# Altium PCB Ultrasonic_Localisation_backup.PcbDoc
Units mm, origin at the board's own origin, x right, y up, seen from the top; angles counter-clockwise.
Board outline 29 x 59 mm, 4 copper layers (Top Layer, MidLayer1, GroundPlane, Bottom Layer); 42 components, 37 nets, 234 pads, 0 vias.
Unrouted connection lines stored in the file: 104.
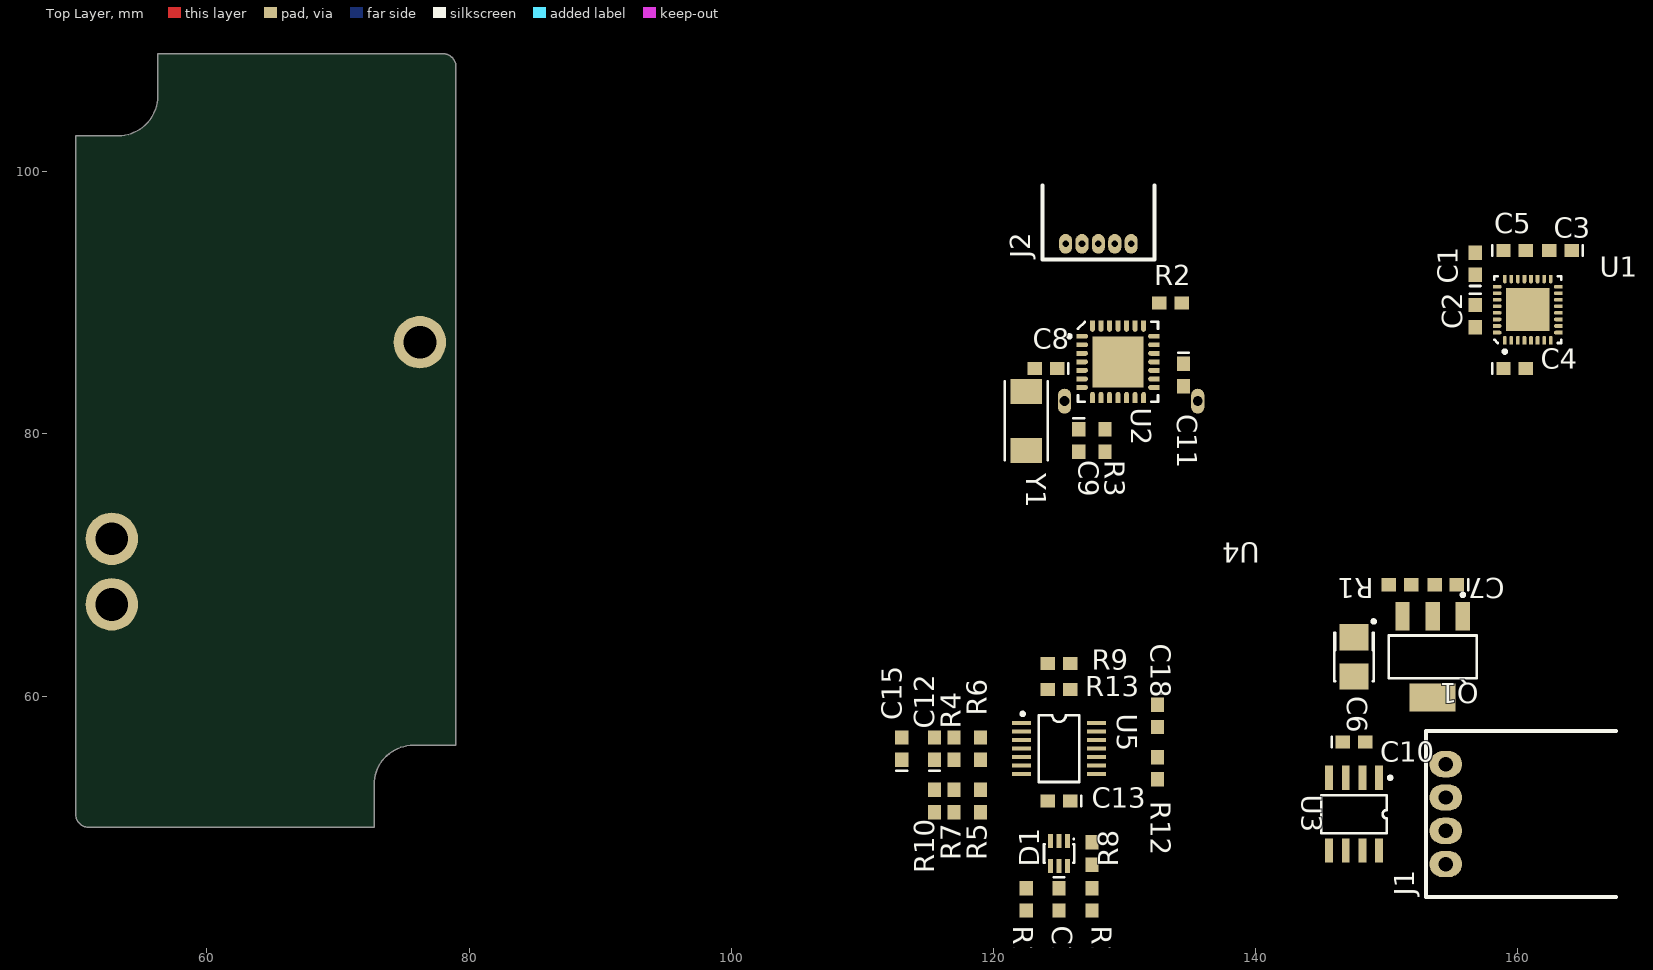
[diagram p0: Top Layer view]
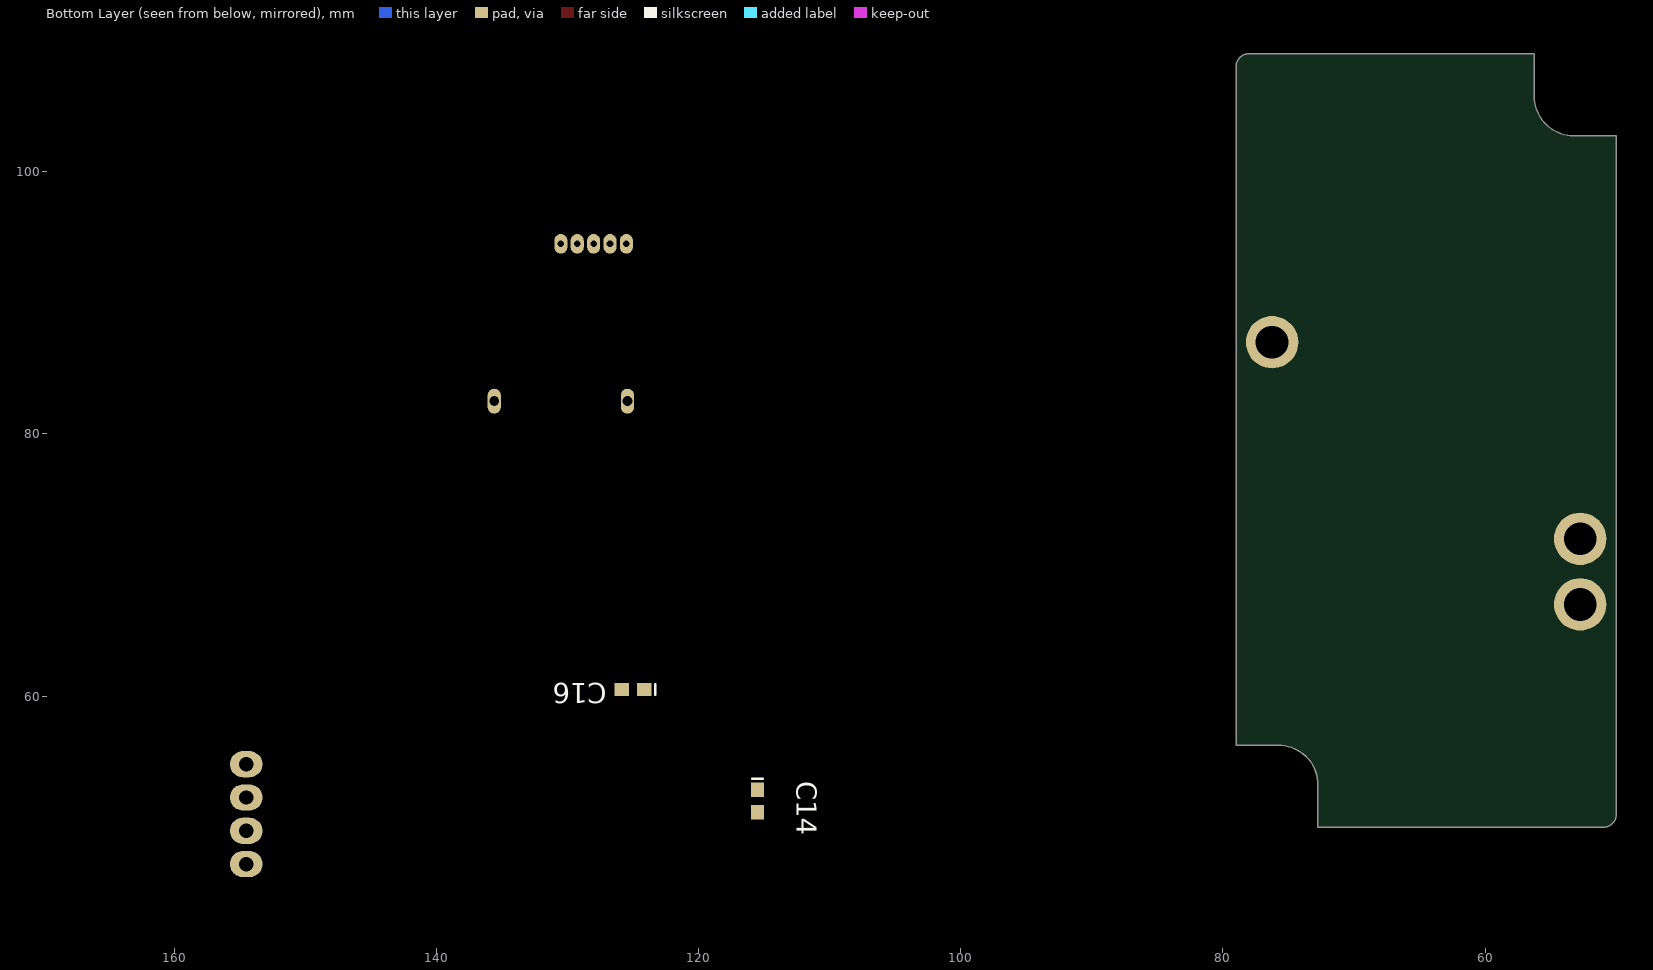
[diagram p1: Bottom Layer view, seen from below]
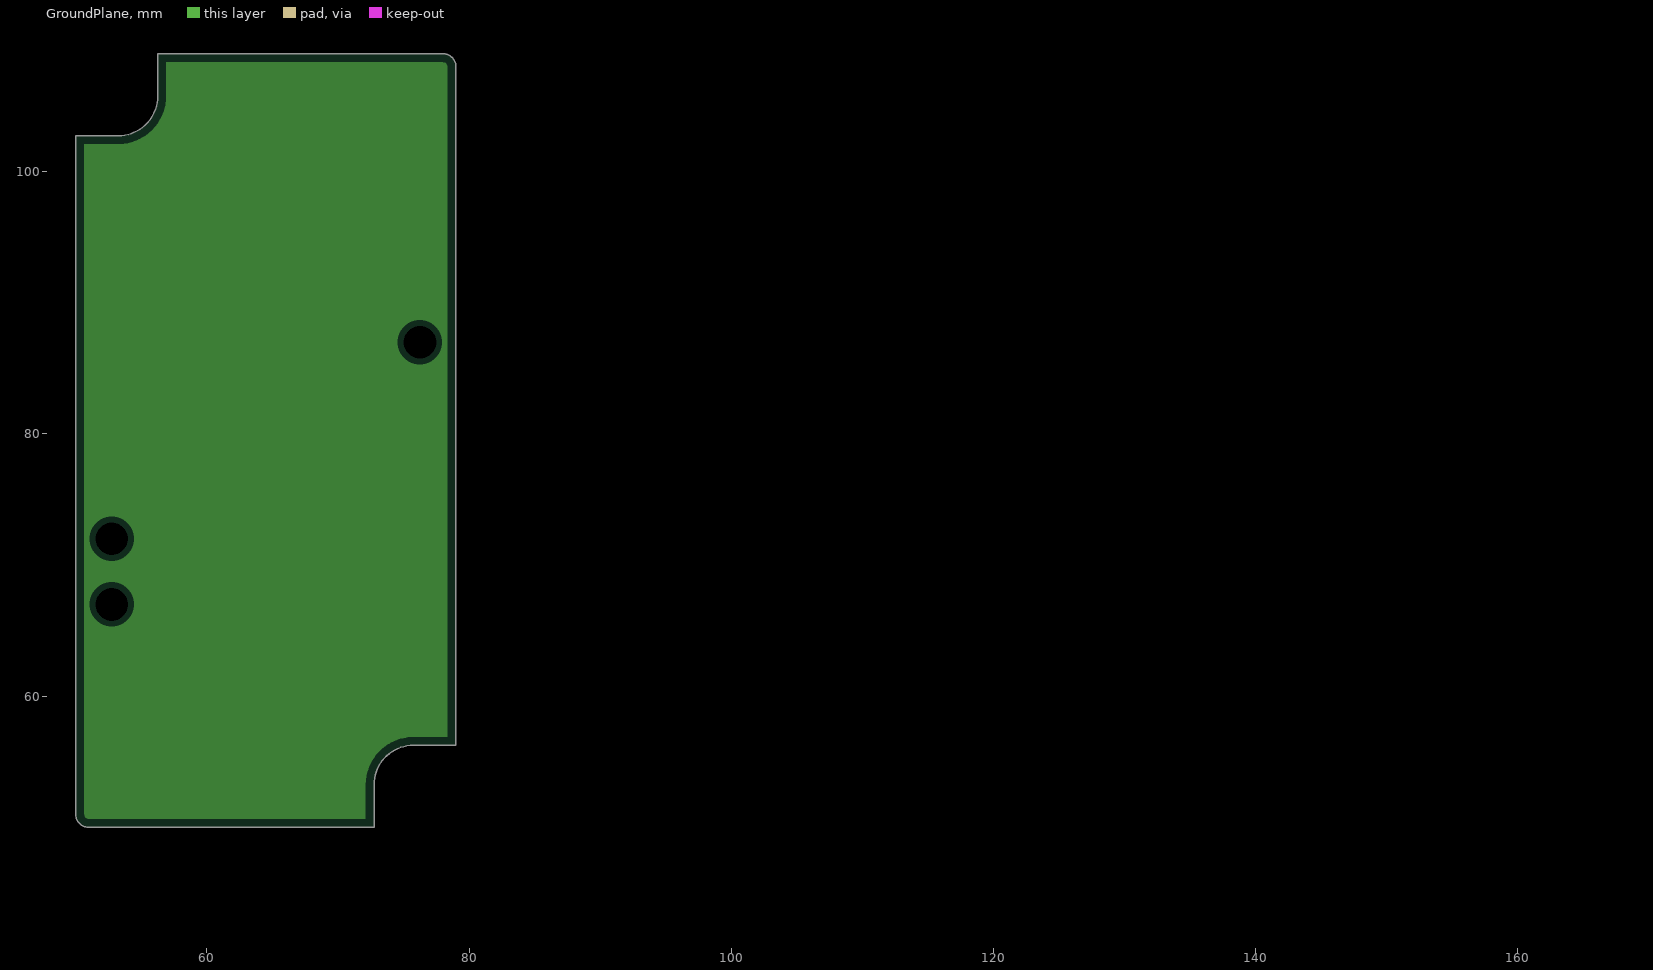
[diagram p2: GroundPlane, clearances drawn from the general rule]

## Layer stack, top to bottom
Top Layer: signal copper 0.036
Dielectric: prepreg 0.32, FR-4, Dk 4.8
MidLayer1: signal copper 0.036
Dielectric: core 0.32, FR-4, Dk 4.8
GroundPlane: plane copper 0.036
Dielectric: prepreg 0.32, FR-4, Dk 4.8
Bottom Layer: signal copper 0.036

## Board outline
50,51 50,102.75 53.25,102.75 ccw(c53.25,105.75) 56.25,105.75 56.25,109 78,109 cw(c78,108) 79,108 79,56.25 75.75,56.25 ccw(c75.75,53.25) 72.75,53.25 72.75,50 51,50 cw(c51,51)

## Design rules (kind name [scope] priority, off if disabled: settings)
Clearance [All] p1: gap=0.152
ComponentClearance [All] p1 off: gap=0.254 collisioncheckmode=3 verticalgap=0.254
HoleSize [All] p1: absolutevalues=TRUE maxlimit=4 minlimit=0.2 maxpercent=80.000 minpercent=20.000
PlaneClearance [All] p1: clearance=0.445
PlaneConnect [All] p1: planeconnectstyle=Direct reliefexpansion=0.508 reliefentries=4 reliefconductorwidth=0.254 reliefairgap=0.254
PolygonConnect [All] p1: connectstyle=Direct reliefconductorwidth=0.254 reliefentries=4 polygonreliefangle="90 Angle"
RoutingVias [All] p1: holewidth=0.2 width=0.65 viastyle="Through Hole" minholewidth=0.2 minwidth=0.65 maxholewidth=1.5 maxwidth=2.1
ShortCircuit ShortCircuit_Unconnected_Pins [IsPad and not InnetClass('All') vs IsPad and not InnetClass('All')] p1: allowed=TRUE
ShortCircuit [All] p2: allowed=FALSE
SolderMaskExpansion [All] p1: expansion=0.075
TestPointUsage [All] p1: valid=0 allowmultiple=FALSE
Testpoint [All] p1: side=15 testpointundercomponent=TRUE minsize=1.016 maxsize=2.54 preferedsize=1.524 minholesize=0 maxholesize=1.016 preferedholesize=0.813 testpointgrid=0.025 style=1023 order=0123456789
Width [All] p1: maxlimit=3 minlimit=0.152 preferedwidth=0.3 minimp=50.000000 maximp=50.000000 favimp=50.000000
14 further rules are at their usual default settings.

## Classes and differential pairs
component class Ultrasonic_Localisation: C6 C7 C8 C9 C10 C11 J1 J2 Q1 R1 R2 R3 U2 U3 U4 Y1
component class S2: C1 C2 C3 C4 C5 U1
component class S1: C12 C13 C14 C15 C16 C17 C18 D1 R4 R5 R6 R7 R8 R9 R10 R11 R12 R13 R14 U5

## Components (designator, comment, footprint, x,y, rotation, side; value= is the part's Value field where it differs from the comment)
C1 "UMK107BJ104KA-T" CC1608-0603 156.75,92.985 r90 top
C2 "UMK107BJ104KA-T" CC1608-0603 156.75,88.985 r270 top
C3 "UMK107BJ104KA-T" CC1608-0603 163.25,93.985 r180 top
C4 "UMK107BJ104KA-T" CC1608-0603 159.75,84.985 r0 top
C5 "UMK107BJ104KA-T" CC1608-0603 159.75,93.985 r0 top
C6 "TPSB106K016R0800" TC3528-1411 147.5,63 r270 top
C7 "UMK107BJ104KA-T" CC1608-0603 154.5,68.5 r180 top
C8 "Cap" CC1608-0603 124,85 r180 top
C9 "Cap" CC1608-0603 126.5,79.5 r270 top
C10 "UMK107BJ104KA-T" CC1608-0603 147.5,56.5 r0 top
C11 "UMK107BJ104KA-T" CC1608-0603 134.5,84.5 r270 top
C12 "Cap" CC1608-0603 115.5,56 r90 top
C13 "Cap" CC1608-0603 125,52 r180 top
C14 "Cap" CC1608-0603 115.5,52 r270 bottom
C15 "Cap" CC1608-0603 113,56 r90 top
C16 "Cap" CC1608-0603 125,60.5 r0 bottom
C17 "Cap" CC1608-0603 125,44.5 r270 top
C18 "Cap" CC1608-0603 132.5,58.5 r270 top
D1 "BAV99DW-7-F" SOT-323-6L 125,48 r180 top
J1 "70553-0003" CON_CAN_Device-4 154.5,51 r90 top
J2 "53048-0510" CON_ISP_H 128,94.5 r180 top
Q1 "MIC5201-5.0YS" DSO-G3 153.5,63 r180 top
R1 "Res" CR1608-0603 151,68.5 r0 top
R2 "Res" CR1608-0603 133.5,90 r0 top
R3 "Res" CR1608-0603 128.5,79.5 r270 top
R4 "Res" CR1608-0603 117,56 r270 top
R5 "Res" CR1608-0603 119,52 r90 top
R6 "Res" CR1608-0603 119,56 r270 top
R7 "Res" CR1608-0603 117,52 r270 top
R8 "Res" CR1608-0603 127.5,48 r270 top
R9 "Res" CR1608-0603 125,62.5 r180 top
R10 "Res" CR1608-0603 115.5,52 r270 top
R11 "Res" CR1608-0603 122.5,44.5 r270 top
R12 "Res" CR1608-0603 132.5,54.5 r270 top
R13 "Res" CR1608-0603 125,60.5 r0 top
R14 "Res" CR1608-0603 127.5,44.5 r270 top
U1 "p" QFN5X5-32 160.75,89.485 r0 top
U2 "PIC18F2580-I/ML" QFN6X6-28 129.5,85.5 r270 top
U3 "TJA1040TD-T" SO-G8/E2.9 147.5,51 r180 top
U4 "MAXBOTIX_SENSOR" "Maxbotix Sensor" 130.5,82.5 r180 top
U5 "LMV324IPWR" TSSO5x6-G14/X.3 125,56 r270 top
Y1 "CS10-16.000MABJ-UT" CS10 122.5,81 r270 top

## Footprints (in the part's own frame and the unit in brackets; to place one, negate y for a bottom-side part, rotate by r counter-clockwise, add the part's x,y. Pads: shape width x height; smd on the part's side, far side on the other; paste and mask are expansions set on the pad)
CC1608-0603 [mm] "Chip Capacitor; Body 1.6 x 0.8 mm (LxW typ)"
  rect 1.1x1 smd: 1(-0.85,0) 2(0.85,0)
  silkscreen extent -1.7,-0.4 -1.7,0.4
CON_CAN_Device-4 [mm] "4-pin CAN connector - device side"
  oval 2x2.5 hole 1.1: 1(-3.81,0) 2(-1.27,0) 3(1.27,0) 4(3.81,0)
  silkscreen extent -6.33,-13 6.33,1.5
CON_ISP_H [mm] "Microchip ISP Connector horizontal"
  oval 1x1.5 hole 0.5: 1(-2.5,0) 2(-1.25,0) 3(0,0) 4(1.25,0) 5(2.5,0)
  silkscreen extent -4.28,-4.45 4.28,1.2
CR1608-0603 [mm] "Chip Resistor; Body 1.6 x 0.8 mm (LxW typ)"
  rect 1.1x1 smd: 1(-0.85,0) 2(0.85,0)
CS10 [mm] "Crystal"
  rect 1.9x2.4 smd: 1(-2.25,0) 2(2.25,0)
  silkscreen extent -3,-1.65 3,1.65
DSO-G3 [mm] "SOT-223/SC-73; 4 Leads; Body 6.7 x 7.3 mm, inc. leads (LxW max)"
  rect 1.1x2.15 smd: 1(-2.3,-3.1) 2(0,-3.1) 3(2.3,-3.1)
  rect 3.5x2.15 smd: 4(0,3.1)
  silkscreen extent -3.35,-4.85 3.35,1.63
"Maxbotix Sensor" [mil] "Maxbotix Ultrasonic Sensor"
  oval 40x75 hole 30: 1(-200,0) 2(200,0)
QFN5X5-32 [mm] "Quad Flat No Lead; 32 Terminals; Body 5 x 5 mm; Pitch 0.5 mm"
  rect 0.28x0.28 smd: 1(-1.75,-2.515) 2(-1.25,-2.515) 3(-0.75,-2.515) 4(-0.25,-2.515) 5(0.25,-2.515) 6(0.75,-2.515) 7(1.25,-2.515) 8(1.75,-2.515) 9(2.515,-1.75) 10(2.515,-1.25) 11(2.515,-0.75) 12(2.515,-0.25) 13(2.515,0.25) 14(2.515,0.75) 15(2.515,1.25) 16(2.515,1.75) 17(1.75,2.515) 18(1.25,2.515) 19(0.75,2.515) 20(0.25,2.515) 21(-0.25,2.515) 22(-0.75,2.515) 23(-1.25,2.515) 24(-1.75,2.515) 25(-2.515,1.75) 26(-2.515,1.25) 27(-2.515,0.75) 28(-2.515,0.25) 29(-2.515,-0.25) 30(-2.515,-0.75) 31(-2.515,-1.25) 32(-2.515,-1.75)
  oval 0.28x0.66 smd: 1(-1.75,-2.325) 2(-1.25,-2.325) 3(-0.75,-2.325) 4(-0.25,-2.325) 5(0.25,-2.325) 6(0.75,-2.325) 7(1.25,-2.325) 8(1.75,-2.325) 17(1.75,2.325) 18(1.25,2.325) 19(0.75,2.325) 20(0.25,2.325) 21(-0.25,2.325) 22(-0.75,2.325) 23(-1.25,2.325) 24(-1.75,2.325)
  oval 0.66x0.28 smd: 9(2.325,-1.75) 10(2.325,-1.25) 11(2.325,-0.75) 12(2.325,-0.25) 13(2.325,0.25) 14(2.325,0.75) 15(2.325,1.25) 16(2.325,1.75) 25(-2.325,1.75) 26(-2.325,1.25) 27(-2.325,0.75) 28(-2.325,0.25) 29(-2.325,-0.25) 30(-2.325,-0.75) 31(-2.325,-1.25) 32(-2.325,-1.75)
  rect 3.3x3.3 smd: 33(0,0)
  silkscreen extent -2.55,-3.33 2.55,2.55
QFN6X6-28 [mm] "Quad Flat No Lead, Plastic, Punch; 28 Terminals; Body 6 x 6 mm; Pitch 0.65 mm"
  oval 0.37x0.86 smd: 1(-1.95,-2.725) 2(-1.3,-2.725) 3(-0.65,-2.725) 4(0,-2.725) 5(0.65,-2.725) 6(1.3,-2.725) 7(1.95,-2.725) 15(1.95,2.725) 16(1.3,2.725) 17(0.65,2.725) 18(0,2.725) 19(-0.65,2.725) 20(-1.3,2.725) 21(-1.95,2.725)
  rect 0.37x0.37 smd: 1(-1.95,-2.97) 2(-1.3,-2.97) 3(-0.65,-2.97) 4(0,-2.97) 5(0.65,-2.97) 6(1.3,-2.97) 7(1.95,-2.97) 8(2.97,-1.95) 9(2.97,-1.3) 10(2.97,-0.65) 11(2.97,0) 12(2.97,0.65) 13(2.97,1.3) 14(2.97,1.95) 15(1.95,2.97) 16(1.3,2.97) 17(0.65,2.97) 18(0,2.97) 19(-0.65,2.97) 20(-1.3,2.97) 21(-1.95,2.97) 22(-2.97,1.95) 23(-2.97,1.3) 24(-2.97,0.65) 25(-2.97,0) 26(-2.97,-0.65) 27(-2.97,-1.3) 28(-2.97,-1.95)
  oval 0.86x0.37 smd: 8(2.725,-1.95) 9(2.725,-1.3) 10(2.725,-0.65) 11(2.725,0) 12(2.725,0.65) 13(2.725,1.3) 14(2.725,1.95) 22(-2.725,1.95) 23(-2.725,1.3) 24(-2.725,0.65) 25(-2.725,0) 26(-2.725,-0.65) 27(-2.725,-1.3) 28(-2.725,-1.95)
  rect 3.9x3.9 smd: 29(0,0)
  silkscreen extent -3.05,-3.83 3.05,3.05
SO-G8/E2.9 [mm] "Small Outline; 8 Leads; Body Width 3.9 mm; Pitch 1.27 mm"
  rect 0.6x1.85 smd: 1(-1.905,-2.775) 2(-0.635,-2.775) 3(0.635,-2.775) 4(1.905,-2.775) 5(1.905,2.775) 6(0.635,2.775) 7(-0.635,2.775) 8(-1.905,2.775)
  silkscreen extent -2.88,-2.9 2.5,1.45
SOT-323-6L [mm] "SOT-323-6L"
  rect 0.4x1.05 smd: 1(-0.65,-0.95) 2(0,-0.95) 3(0.65,-0.95) 4(0.65,0.95) 5(0,0.95) 6(-0.65,0.95)
  silkscreen extent -1.17,-1.15 1.15,0.7
TC3528-1411 [mm] "Capacitor, SM Tantalum; Body 3.5 x 2.8 mm (LxW typ)"
  rect 2x2.2 smd: 1(-1.5,0) 2(1.5,0)
  silkscreen extent -2.82,-1.5 1.85,1.63
TSSO5x6-G14/X.3 [mm] "Shrink Small Outline; 14 Leads; Body Width 4.4 mm; Pitch 0.65 mm"
  rect 0.3x1.45 smd: 1(-1.95,-2.875) 2(-1.3,-2.875) 3(-0.65,-2.875) 4(0,-2.875) 5(0.65,-2.875) 6(1.3,-2.875) 7(1.95,-2.875) 8(1.95,2.875) 9(1.3,2.875) 10(0.65,2.875) 11(0,2.875) 12(-0.65,2.875) 13(-1.3,2.875) 14(-1.95,2.875)
  silkscreen extent -2.77,-2.9 2.55,1.55

## Part data
C1 C2 C3 C4 C5 C7 C10 C11: library part Cap, "Capacitor"
C6: library part "Cap Pol", "Polarized Capacitor (Surface Mount)"
C8 C9 C12 C13 C14 C15 C16 C17 C18: "Capacitor"
D1: library part BAV99DW, "Quad surface mount switching diode array"
J1: library part CON_CAN_DEVICE, "4 pin CAN Connector 2.54mm pitch"
J2: library part CON_ISP_Header_5p_1.25mm_horizontal, "6 pin header - 1.25mm pitch horizontal"
Q1: "5V LDO 200mA"
R1 R2 R3 R4 R5 R6 R7 R8 R9 R10 R11 R12 R13 R14: "Resistor"
U1: library part MAX3243E_SMALL, "RS232 Transceiver"
U2: "8 bit CAN MCU"
U3: "5V CAN Transceiver"
U4: "Maxbotix Ultrasonic Sensor"
U5: "Rail-to-Rail Operational Amplifier"
Y1: library part CS10, "Crystal Oscillator"

## Free pads (board coordinates)
  round 4 hole 2.5: 0(52.75,67) 0(52.75,72) 0(76.25,87)

## Nets (pads, with @x,y where several pads share a name; then routed paths per layer and width w, separated by ;. In a path a pad name is that pad's centre, name@x,y a point inside that pad or via, vN(x,y) a via of type N, cw(c..) or ccw(c..) an arc to the next point about the centre after c; other vN are vias at no path point)
C\A\N\_\E\N\: U2.3 U3.8
CAN_RX: U2.21 U3.4
CAN_TX: U2.20 U3.1
CANH/UART_TX: J1.2 U1.6 U3.7
CANL/UART_RX: J1.3 U1.1 U3.6
GND: C3.2 C4.2 C5.2 C6.2 C7.2 C8.1 C9.1 C10.2 C11.2 C13.1 C14.1 C15.1 C17.1 C18.1 J1.4 J2.5 pad.0 Q1.2 Q1.4 R10.1 U1.24 U1.33 U2.5 U2.16 U2.29 U3.2 U5.11
M\C\L\R\: J2.2 R2.1 U2.26
NetC1_1: C1.1 U1.28
NetC1_2: C1.2 U1.23
NetC2_1: C2.1 U1.29
NetC2_2: C2.2 U1.30
NetC4_1: C4.1 U1.31
NetC5_1: C5.1 U1.27
NetC7_1: C7.1 J1.1 Q1.1 R1.2
NetC8_2: C8.2 U2.6 Y1.1
NetC9_2: C9.2 R3.2 Y1.2
NetC12_1: C12.1 R4.2 R7.1
NetC12_2: C12.2 U2.13 U4.1
NetC14_2: C14.2 R5.1 R7.2 R10.2 U5.10
NetC15_2: C15.2 R6.1 R9.2
NetC16_2: C16.2 R9.1 R13.2 U5.9
NetC17_2: C17.2 R14.2
NetC18_2: C18.2 R12.1
NetD1_1: D1.1 D1.2 D1.5 R8.1 U5.1 U5.5
NetD1_3: D1.3 D1.4 R11.1 R12.2 U5.6
NetD1_6: D1.6 R8.2 R14.1 U5.2
NetR3_1: R3.1 U2.7
NetR4_1: R4.1 U5.3
NetR11_2: R11.2 U5.7
NetU2_12: U2.12 U4.2
PGC: J2.4 U2.24
PGD: J2.3 U2.25
SNSR_OP: C16.1 R13.1 U2.27 U5.8
U\A\R\T\_\E\N\: U1.21 U2.4
USART/RX: U1.18 U2.15
USART/TX: U1.12 U2.14
VCC5V: C3.1 C6.1 C10.1 C11.1 C13.2 J2.1 Q1.3 R1.1 R2.2 R5.2 R6.2 U1.22 U1.26 U2.17 U3.3 U5.4
pads on no net: U1.2 U1.3 U1.4 U1.5 U1.7 U1.8 U1.9 U1.10 U1.11 U1.13 U1.14 U1.15 U1.16 U1.17 U1.19 U1.20 U1.25 U1.32 U2.1 U2.2 U2.8 U2.9 U2.10 U2.11 U2.18 U2.19 U2.22 U2.23 U2.28 U3.5 U5.12 U5.13 U5.14

## Polygon pours and split planes (outlines as drawn)
no net on GroundPlane (split plane): 78.137,108.332 78.254,108.254 78.332,108.137 78.356,108.017 78.353,108 78.353,56.897 75.75,56.897 75.74,56.895 75.18,56.851 74.623,56.718 74.095,56.499 73.607,56.2 73.172,55.828 72.8,55.393 72.501,54.905 72.282,54.377 72.149,53.82 72.105,53.26 72.103,53.25 72.103,50.647 51,50.647 50.983,50.644 50.863,50.668 50.746,50.746 50.668,50.863 50.644,50.983 50.647,51 50.647,102.103 53.25,102.103 53.26,102.105 53.82,102.149 54.377,102.282 54.905,102.501 55.393,102.8 55.828,103.172 56.2,103.607 56.499,104.095 56.718,104.623 56.851,105.18 56.895,105.74 56.897,105.75 56.897,108.353 78,108.353 78.017,108.356

## Silkscreen, mask and mechanical layers (free items; w line width, h text height)
Top Solder:
  circle w1: c53,56 r1.5
Bottom Solder:
  circle w1: c53,56 r1.5
Mechanical 16:
  lines w0.2: 50,102.75 50,51 ccw(c51,51) 51,50 72.75,50 72.75,53.25 cw(c75.75,53.25) 75.75,56.25 79,56.25 79,108 ccw(c78,108) 78,109 56.25,109 56.25,105.75 cw(c53.25,105.75) 53.25,102.75 ; 82,73.75 85.25,73.75